# Altium PCB Tensile Test PCB Green.pcbdoc
Units mm, origin at the board's own origin, x right, y up, seen from the top; angles counter-clockwise.
Board outline 132.9 x 132.77 mm, 2 copper layers (Top Layer, Bottom Layer); 31 components, 47 nets, 166 pads, 13 vias.
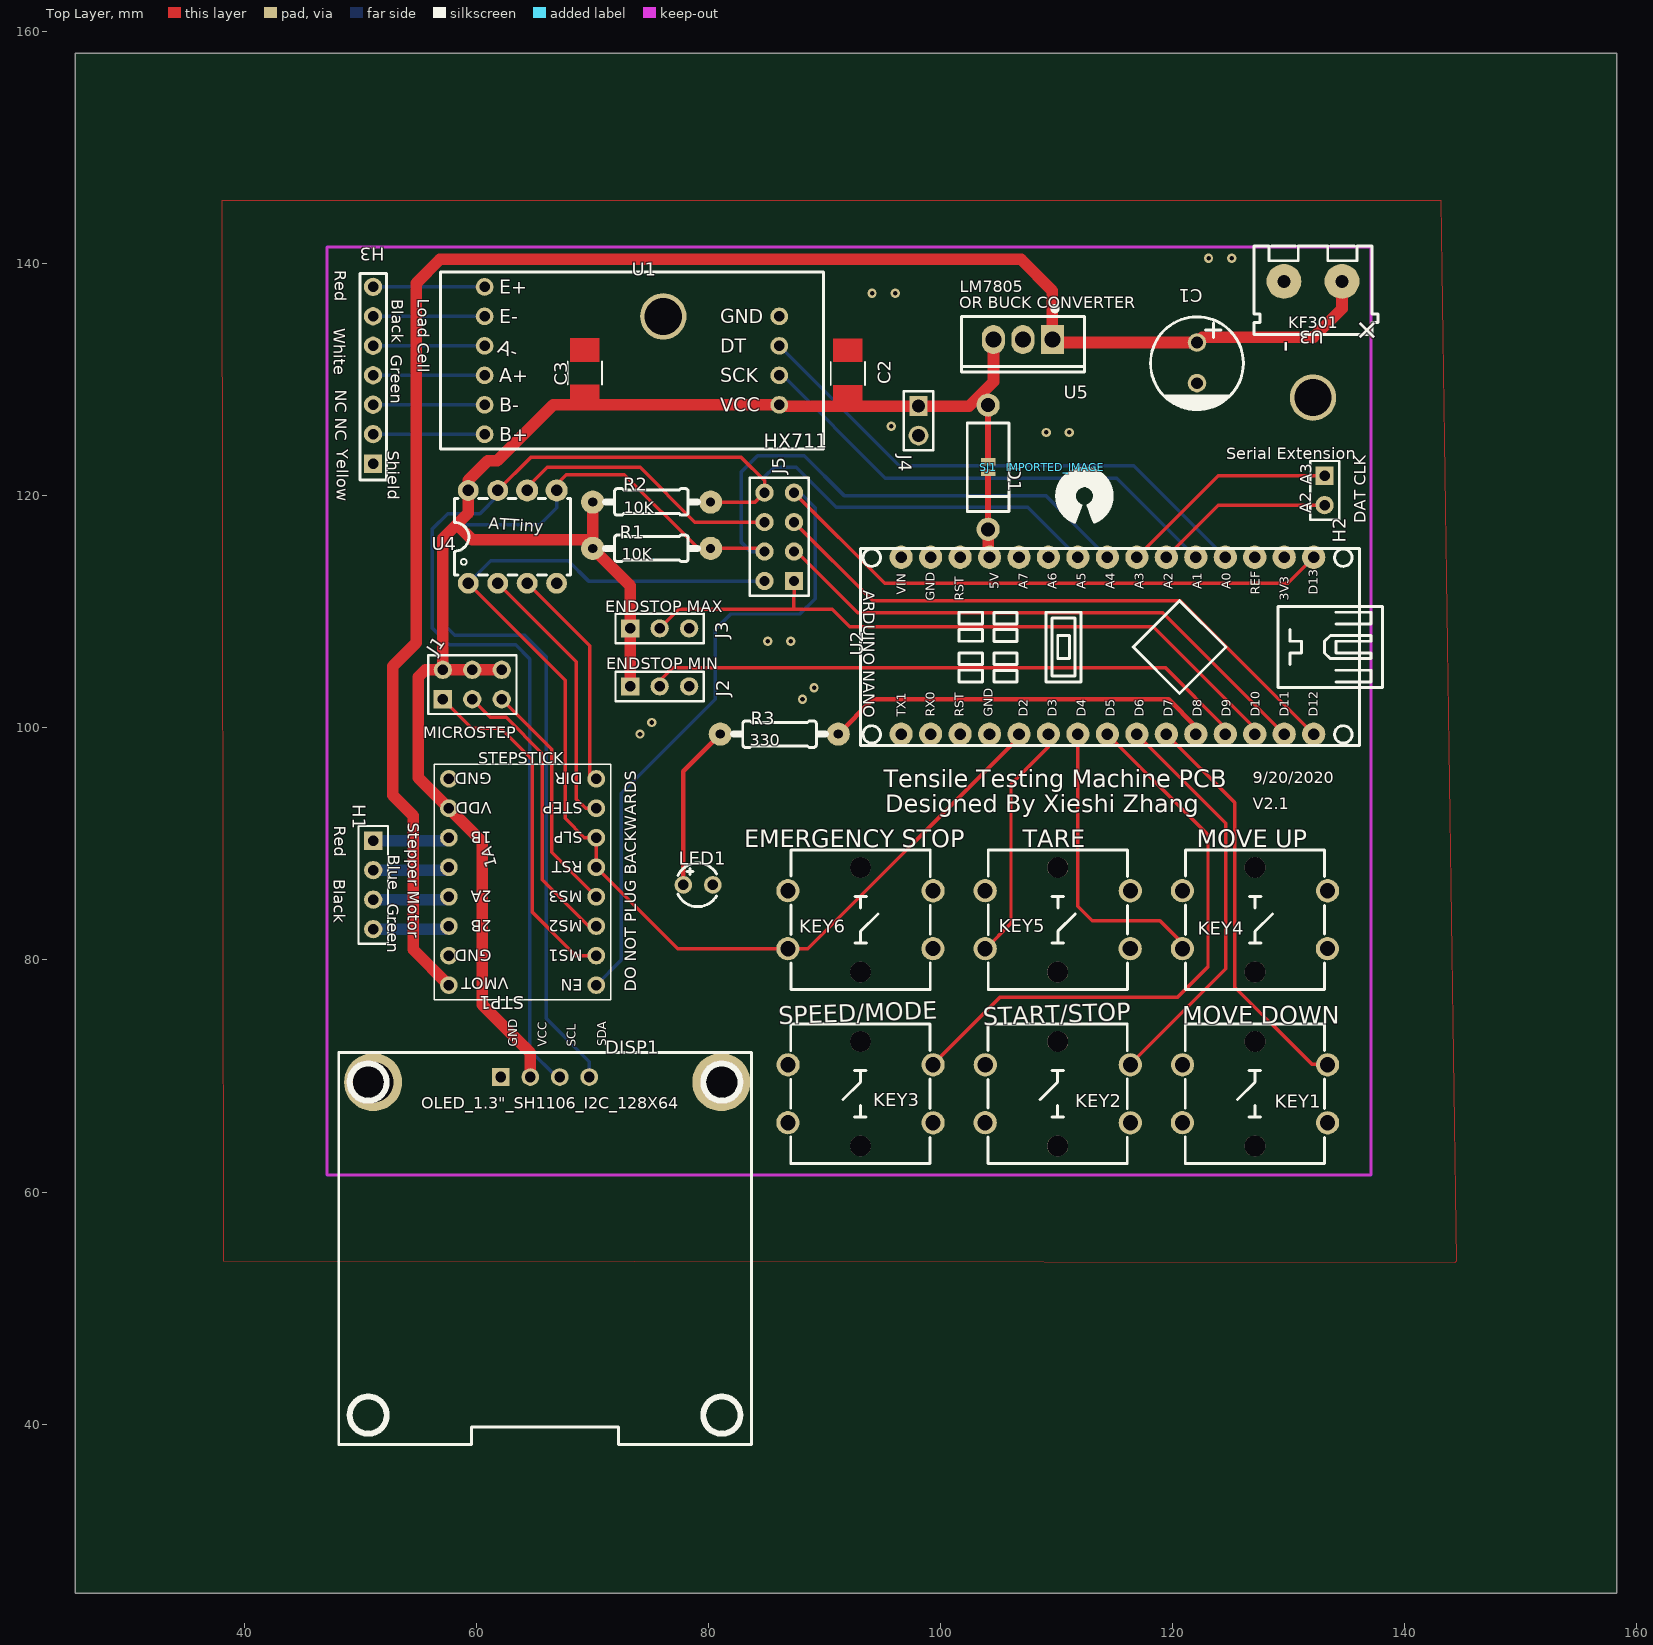
[diagram p0: Top Layer view]
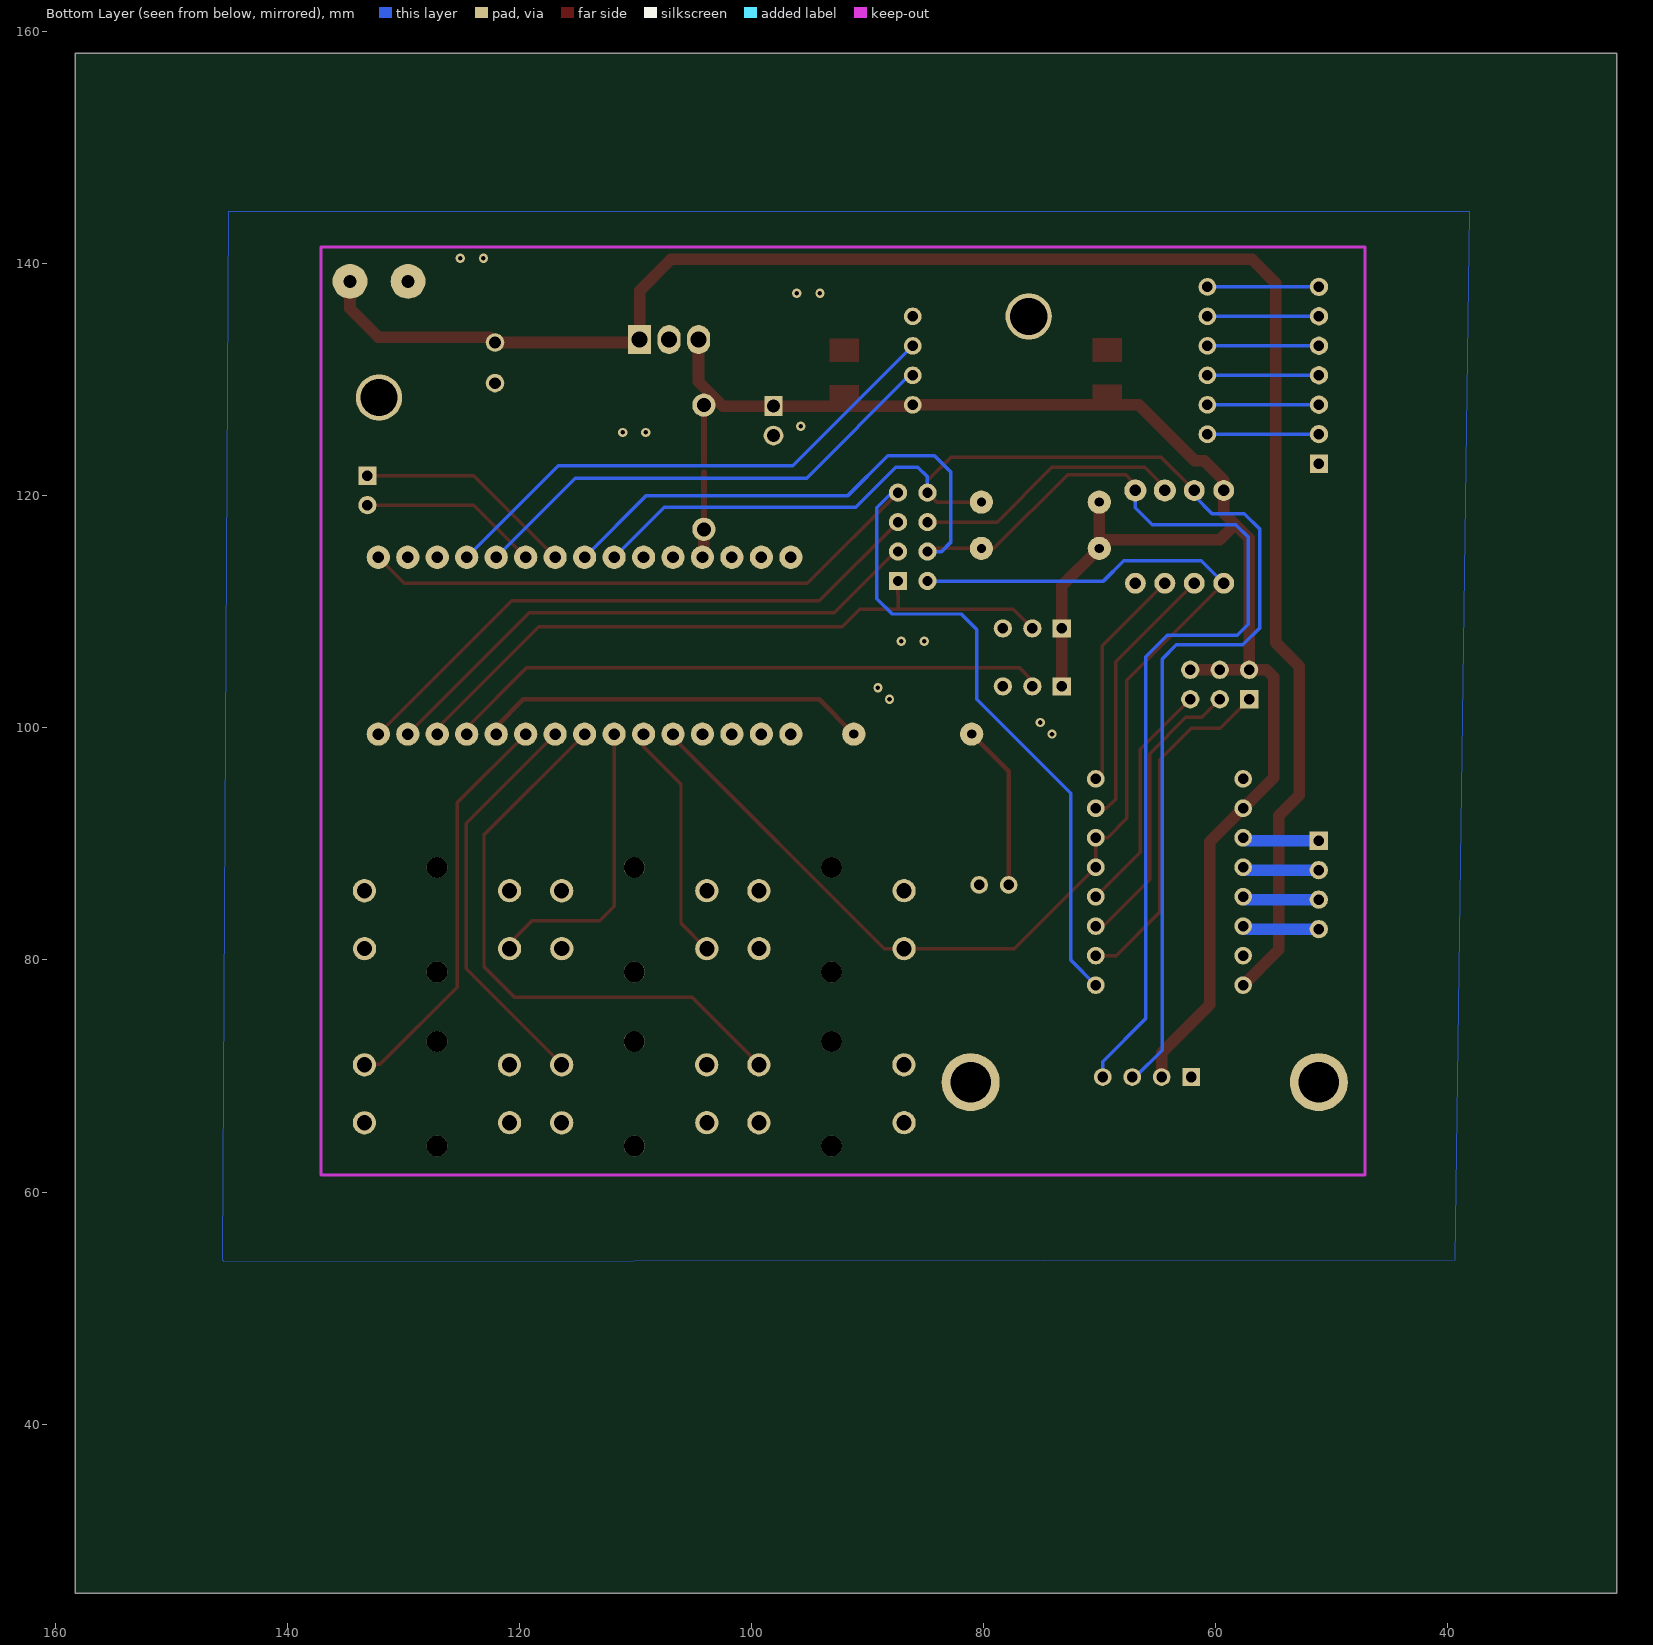
[diagram p1: Bottom Layer view, seen from below]

## Layer stack, top to bottom
Top Layer: signal copper (thickness not stored)
Dielectric: dielectric 0.32, FR-4, Dk 4.8
Bottom Layer: signal copper (thickness not stored)

## Board outline
158.3,25.4 25.4,25.4 25.4,158.169 158.3,158.169

## Components (designator, comment, footprint, x,y, rotation, side; value= is the part's Value field where it differs from the comment)
C1 "100uF" CAP-TH_BD8.0-P3.50-D1.0-FD 122.1,131.469 r270 top
C2 "10uF" C_1210_HANDSOLDERING 90.77,130.439 r90 top
C3 "10uF" C_1210_HANDSOLDERING 68.1,130.469 r90 top
D1 "SR240" DO-15_BD3.1-L6.7-P10.70-D0.9-FD 104.1,122.469 r270 top
DISP1 "SSH1106_1.3IN_128X64_I2C_OLED_NEW_TAYEB COPY" "SSH1106 1.3IN 128X64 I2C (HOLES)" 62.1,69.469 r0 top
H1 "HDR-F-2.54_1x4" HDR-F-2.54_1X4 51.1,86.469 r270 top
H2 "HDR-F-2.54_1x2" HDR-F-2.54_1X2 133.1,120.469 r270 top
H3 "sch_HEADER-JV-FEMALE-2.54_1X7" HEADER-JV-FEMALE-2.54_1X7 51.089,122.778 r0 top
IMPORTED_IMAGE "IMPORTED_IMAGE" IMPORTED_IMAGE 109.903,122.477 r0 top
J1 "HDR-M-2.54_2x3" HDR-M-2.54_2X3 57.1,102.469 r0 top
J2 "HDR-M-2.54_1x3" HDR-M-2.54_1X3 75.79,103.579 r0 top
J3 "HDR-M-2.54_1x3" HDR-M-2.54_1X3 75.79,108.579 r0 top
J4 "HDR-M-2.54_1x2" HDR-M-2.54_1X2 98.1,126.469 r270 top
J5 "HDR-M-2.54_2x4" HDR-M-2.54_2X4 86.1,116.469 r90 top
KEY1 "B3F-4000" KEY-TH_4P-L12.0-W12.0-P5.00-LS13.4-EH 127.1,68.469 r180 top
KEY2 "B3F-4000" KEY-TH_4P-L12.0-W12.0-P5.00-LS13.4-EH 110.1,68.469 r180 top
KEY3 "B3F-4000" KEY-TH_4P-L12.0-W12.0-P5.00-LS13.4-EH 93.1,68.469 r180 top
KEY4 "B3F-4000" KEY-TH_4P-L12.0-W12.0-P5.00-LS13.4-EH 127.1,83.469 r0 top
KEY5 "B3F-4000" KEY-TH_4P-L12.0-W12.0-P5.00-LS13.4-EH 110.1,83.469 r0 top
KEY6 "B3F-4000" KEY-TH_4P-L12.0-W12.0-P5.00-LS13.4-EH 93.1,83.469 r0 top
LED1 "TJ-L3FYTLDRMFCSFLC2R-A5" LED-TH_BD3.8-P2.54-FD 79.1,86.469 r0 top
R1 "10K" "SDK 1/4W RESISTOR" 75.1,115.469 r180 top
R2 "10K" "SDK 1/4W RESISTOR" 75.1,119.469 r180 top
R3 "330" "SDK 1/4W RESISTOR" 86.1,99.469 r0 top
SJ1 "JUMPER-PAD-2-NO" PAD-JUMPER-2-NO_NO_SILK 104.1,122.469 r90 top
STP1 "STEPPERDRIVER" STEPERDRIVER 64.1,86.469 r180 top
U1 "HX711" XFW-HX711 86.1,135.469 r0 top
U2 "Arduino_Nano" PRV_ARDUINONANO 93.1,98.469 r90 top
U3 "KF301-2P-5.0MM EDITED" "KF301-2P-5.0MM EDITED" 132.1,137.469 r180 top
U4 "ATTINY85-20PU" PDIP-8_L9.5-W6.6-P2.54-LS8.0-BL 63.1,116.469 r0 top
U5 "LM7805CT" TO-220-3_L10.0-W4.5-P2.54-L 107.1,133.469 r180 top

## Footprints (in the part's own frame and the unit in brackets; to place one, negate y for a bottom-side part, rotate by r counter-clockwise, add the part's x,y. Pads: shape width x height; smd on the part's side, far side on the other; paste and mask are expansions set on the pad)
C_1210_HANDSOLDERING [mm]
  round 0 smd: 1(-1.888,-1.236) 2(2.112,-1.236)
  Top Layer region: -2.888,0.014 -0.888,0.014 -0.888,-2.486 -2.888,-2.486
  Top Layer region: 1.112,0.014 3.112,0.014 3.112,-2.486 1.112,-2.486
  silkscreen extent -0.89,-2.71 1.11,0.24
CAP-TH_BD8.0-P3.50-D1.0-FD [mm]
  round 1.6 hole 1: 1(-1.75,0) 2(1.75,0)
  silkscreen extent -3.96,-4 4.04,4
DO-15_BD3.1-L6.7-P10.70-D0.9-FD [mm]
  round 2 hole 1.2: 1(-5.35,0) 2(5.35,0)
  silkscreen extent -3.8,-1.8 3.8,1.8
HDR-F-2.54_1X2 [mil]
  rect 62x62 hole 35: 1(-50,0)
  round 62 hole 35: 2(50,0)
  silkscreen extent -100,-49 100,50
HDR-F-2.54_1X4 [mil]
  rect 62x62 hole 35: 1(-150,0)
  round 62 hole 35: 2(-50,0) 3(50,0) 4(150,0)
  silkscreen extent -200,-50 200,50
HDR-M-2.54_1X2 [mm]
  rect 1.7x1.575 hole 1.1: 1(-1.27,0)
  round 1.7 hole 1.1: 2(1.27,0)
  silkscreen extent -2.54,-1.27 2.54,1.27
HDR-M-2.54_1X3 [mil]
  rect 62x62 hole 35: 1(-100,0)
  round 62 hole 35: 2(0,0) 3(100,0)
  silkscreen extent -150,-50 150,50
HDR-M-2.54_2X3 [mil]
  rect 62x62 hole 35: 1(0,0)
  round 62 hole 35: 2(0,100) 3(100,0) 4(100,100) 5(200,0) 6(200,100)
  silkscreen extent -50,-50 250,150
HDR-M-2.54_2X4 [mil]
  rect 62x62 hole 35: 1(-150,-50)
  round 62 hole 35: 2(-150,50) 3(-50,-50) 4(-50,50) 5(50,-50) 6(50,50) 7(150,-50) 8(150,50)
  silkscreen extent -200,-100 200,100
HEADER-JV-FEMALE-2.54_1X7 [mm]
  rect 1.575x1.575 hole 0.914: 1(0,0)
  round 1.575 hole 0.914: 2(0,2.54) 3(0,5.08) 4(0,7.62) 5(0,10.16) 6(0,12.7) 7(0,15.24)
  silkscreen extent -1.14,-1.4 1.14,16.38
IMPORTED_IMAGE [mm]
  silkscreen extent 0,-4.84 4.99,0
KEY-TH_4P-L12.0-W12.0-P5.00-LS13.4-EH [mm]
  round 2 hole 1.3: 1(-6.253,-2.499) 2(6.246,-2.497) 3(6.253,2.497) 4(-6.253,2.499)
  round 1.8 hole 1.8 unplated: ""(0,4.5) ""(0,-4.5)
  silkscreen extent -5.99,-6 6.01,6
"KF301-2P-5.0MM EDITED" [mm]
  round 3 hole 1.1: 1(-2.5,-1.016) 2(2.5,-1.016)
  silkscreen extent -5.59,-4.06 5.08,3.56
LED-TH_BD3.8-P2.54-FD [mil]
  round 60 hole 35.43: 1(-50,0) 2(50,0)
  silkscreen extent -68,-74 63,74
PAD-JUMPER-2-NO_NO_SILK [mil]
  rect 25x50 smd: 1(-18,0) 2(18,0)
PDIP-8_L9.5-W6.6-P2.54-LS8.0-BL [mm]
  round 1.8 hole 1: 1(-3.81,-4) 2(-1.27,-4) 3(1.27,-4) 4(3.81,-4) 7(-1.27,4) 8(-3.81,4)
  round 1.905 hole 1: 5(3.81,4) 6(1.27,4)
  silkscreen extent -5,-3.3 5,3.3
PRV_ARDUINONANO [mm]
  round 2 hole 1: 1(1.001,-3.5) 2(1.001,-6.04) 3(1.001,-8.58) 4(1.001,-11.12) 5(1.001,-13.66) 6(1.001,-16.2) 7(1.001,-18.74) 8(1.001,-21.28) 9(1.001,-23.82) 10(1.001,-26.36) 11(1.001,-28.9) 12(1.001,-31.44) 13(1.001,-33.98) 14(1.001,-36.52) 15(1.001,-39.06) 16(16.241,-39.06) 17(16.241,-36.52) 18(16.241,-33.98) 19(16.241,-31.44) 20(16.241,-28.9) 21(16.241,-26.36) 22(16.241,-23.82) 23(16.241,-21.28) 24(16.241,-18.74) 25(16.241,-16.2) 26(16.241,-13.66) 27(16.241,-11.12) 28(16.241,-8.58) 29(16.241,-6.04) 30(16.241,-3.5)
  silkscreen extent 0,-45 17,0
"SDK 1/4W RESISTOR" [mm]
  round 2 hole 0.8: 1(-5.08,0) 2(5.08,0)
  silkscreen extent -3.93,-1.15 3.99,1.13
"SSH1106 1.3IN 128X64 I2C (HOLES)" [mil]
  rect 60x60 hole 36: 1(0,17.32)
  round 60 hole 36: 2(100,17.32) 3(200,17.32) 4(300,17.32)
  silkscreen extent -550,-1230 850,100
STEPERDRIVER [mil]
  round 60 hole 36: 1(-245,340) 2(-245,240) 3(-245,140) 4(-245,40) 5(-245,-60) 6(-245,-160) 7(-245,-260) 8(-245,-360) 9(255,-360) 10(255,-260) 11(255,-160) 12(255,-60) 13(255,40) 14(255,140) 15(255,240) 16(255,340)
  silkscreen extent -295,-410 305,390
TO-220-3_L10.0-W4.5-P2.54-L [mm]
  rect 2.002x2.499 hole 1.4: 1(-2.54,0)
  oval 2x2.5 hole 1.4 copper offset 0,0: 2(0,0) 3(2.54,0)
  silkscreen extent -5.3,-2.86 5.3,2.8
XFW-HX711 [mil]
  round 60 hole 36: 1(-1000,100) 2(-1000,0) 3(-1000,-100) 4(-1000,-200) 5(-1000,-300) 6(-1000,-400) 7(0,-300) 8(0,-200) 9(0,-100) 10(0,0)
  silkscreen extent -1150,-450 150,150

## Free pads (board coordinates)
  round 4 hole 3.2: 1(76.1,135.469) 1(132.1,128.469)
  round 5 hole 3.5: 2(51.1,69.469) 2(81.1,69.469)

## Via types
v1: diameter 0.8, hole 0.4, Top Layer to Bottom Layer, 13 vias

## Nets (pads, with @x,y where several pads share a name; then routed paths per layer and width w, separated by ;. In a path a pad name is that pad's centre, name@x,y a point inside that pad or via, vN(x,y) a via of type N, cw(c..) or ccw(c..) an arc to the next point about the centre after c; other vN are vias at no path point)
1: pad.1@132.1,128.469
2: pad.1@76.1,135.469
3: pad.2@51.1,69.469
4: pad.2@81.1,69.469
+5V: C2.1 C3.1 D1.1 DISP1.2 J1.2 J1.4 J1.6 J2.1 J3.1 J4.1 R1.2 R2.2 SJ1.2 STP1.10 U1.7 U4.8 U5.3 | length 151.1
  Top Layer w0.5: SJ1.2 D1.1
  Top Layer w1: J1.2 55.609,105.01 54.989,104.39 54.989,95.706 STP1.10 60.501,90.196 60.501,76.15 64.641,72.01 DISP1.2 ; 58.306,117.537 59.635,116.209 70.021,116.209 70.021,117.27 ; J1.6 J1.2 57.1,116.329 59.29,118.519 59.29,120.469 59.289,121.349 60.961,123.018 61.799,123.018 66.63,127.849 86.099,127.849 86.21,127.739 J4.1 102.45,127.739 104.56,129.849 U5.3 ; R2.2 R1.2 73.25,112.239 73.25,108.579 J2.1@73.25,103.579
+MOVE: KEY4.1 U2.7 | length 25.7
  Top Layer w0.3: U2.7@111.84,99.47 111.84,84.619 113.089,83.369 118.911,83.369 120.849,81.431 KEY4.1@120.849,80.928
-MOVE: KEY1.1 U2.10 | length 35
  Top Layer w0.3: U2.10@119.46,99.47 125.36,93.57 125.36,77.659 132.01,71.009 KEY1.1@133.351,71.009
D11: J5.3 U2.14 | length 48.8
  Top Layer w0.3: J5.3@87.369,115.198 87.59,115.198 92.861,109.93 119.16,109.93 U2.14@129.62,99.47
D12: J5.5 U2.15 | length 52.4
  Top Layer w0.3: J5.5 94.15,110.959 120.671,110.959 U2.15
DCAL_DT: H2.2 U2.21 | length 15.5
  Top Layer w0.3: U2.21 123.95,119.199 H2.2
DCAL_SCK: H2.1 U2.22 | length 19.1
  Top Layer w0.3: U2.22 123.95,121.739 H2.1
DIR: STP1.8 U4.3 | length 19.7
  Top Layer w0.3: U4.3@64.369,112.47 69.759,107.08 69.759,95.614 STP1.8
DT: U1.9 U2.19 | length 46
  Bottom Layer w0.3: U1.9@86.099,132.929 96.429,122.599 116.65,122.599 U2.19@124.54,114.71
EN: J5.7 STP1.1 U2.16 | length 103.8
  Top Layer w0.3: J5.7@87.369,120.278 95.19,112.459 129.909,112.459 U2.16@132.16,114.71
  Bottom Layer w0.3: STP1.1 72.49,80 72.49,94.379 80.58,102.469 80.58,108.479 81.92,109.819 87.87,109.819 89.2,111.149 89.2,118.979 87.9,120.279 J5.7
ENDSTOP1: J2.2 U2.12 | length 52.4
  Top Layer w0.3: J2.2 75.789,104.07 76.899,105.18 119.391,105.18 124.54,100.029 U2.12@124.54,99.47
ENDSTOP2: J3.2 J5.1 U2.13 | length 59.2
  Top Layer w0.3: J3.2@75.789,108.578 77.44,110.229 90.679,110.229 92.18,108.728 118.329,108.728 127.08,99.978 U2.13@127.08,99.47 ; 87.362,110.229 J5.1@87.369,112.66
ESTOP: J5.2 KEY6.1 STP1.5 STP1.6 U2.5 U4.1 | length 103.9
  Top Layer w0.3: U4.1@59.289,112.47 67.641,104.118 67.641,92.198 69.305,90.534 STP1.6 ; STP1.6 STP1.5 77.346,80.97 KEY6.1 ; KEY6.1@86.846,80.969 88.56,80.969 106.76,99.17 U2.5@106.76,99.47
  Bottom Layer w0.3: U4.1@59.29,112.469 61.22,114.399 67.92,114.399 69.66,112.659 J5.2
GND: C1.2 C2.2 C3.2 DISP1.1 H3.1 J2.3 J3.3 J4.2 KEY1.3 KEY1.4 KEY2.3 KEY2.4 KEY3.3 KEY3.4 KEY4.3 KEY4.4 KEY5.3 KEY5.4 KEY6.3 KEY6.4 LED1.2 STP1.9 STP1.15 U1.10 U2.4 U2.29 U3.2 U4.4 U5.2
  other v1: 74.1,99.469 75.1,100.469 88.1,102.469 89.1,103.469 85.1,107.469 87.1,107.469 109.1,125.469 111.1,125.469 95.76,126.009 94.1,137.469 96.1,137.469 123.1,140.469 125.1,140.469
LED: R3.2 U2.11 | length 33.7
  Top Layer w0.4: R3.2@91.179,99.47 94.169,102.46 119.66,102.46 122,100.118 U2.11@122,99.47
LED1_1: LED1.1 R3.1 | length 14.3
  Top Layer w0.4: LED1.1 77.83,96.279 R3.1
PB1: J5.6 U4.6 | length 23.4
  Top Layer w0.3: U4.6@64.37,120.469 64.37,120.749 66.09,122.469 74.1,122.469 78.83,117.739 J5.6
S$12: 
S$1234: 
S$1236: 
S$1238: 
SCK: U1.8 U2.20 | length 42.4
  Bottom Layer w0.3: U1.8@86.099,130.389 86.389,130.389 95.248,121.53 115.18,121.53 U2.20@122,114.71
SCL: DISP1.3 J5.8 R2.1 U2.24 U4.7 | length 125.5
  Top Layer w0.3: U4.7@61.83,120.469 64.67,123.309 82.81,123.309 84.83,121.289 J5.8 84.02,119.469 R2.1
  Bottom Layer w0.3: U4.7@61.829,120.468 61.829,119.998 60.3,118.469 57.519,118.469 56.17,117.118 56.17,108.649 57.659,107.159 63.379,107.159 64.601,105.939 64.601,72.228 66.92,69.909 DISP1.3 ; J5.8@84.829,120.278 84.829,121.639 85.66,122.47 87.57,122.47 91.012,119.028 107.522,119.028 U2.24@111.84,114.71
SDA: DISP1.4 J5.4 R1.1 U2.23 U4.5 | length 133.2
  Top Layer w0.3: U4.5@66.909,120.468 66.909,120.989 67.74,121.819 72.749,121.819 79.099,115.469 R1.1 ; R1.1 84.56,115.469 J5.4
  Bottom Layer w0.3: U4.5@66.909,120.468 66.909,118.98 65.449,117.519 58.251,117.519 57.189,116.46 57.189,108.929 58.131,107.989 64.151,107.989 66,106.14 66,74.959 69.721,71.238 DISP1.4 ; J5.4@84.829,115.198 83.62,115.198 82.84,115.98 82.84,122.068 84.222,123.45 88.258,123.45 91.68,120.029 109.061,120.029 U2.23@114.38,114.71
SPEED-SEL: KEY3.1 U2.8 | length 50.8
  Top Layer w0.3: KEY3.1@99.35,71.009 105.111,76.77 120.402,76.77 123.051,79.419 123.051,90.801 U2.8@114.38,99.47
START: KEY2.1 U2.9 | length 35.1
  Top Layer w0.3: KEY2.1@116.351,71.009 124.59,79.249 124.59,91.799 U2.9@116.92,99.47
STEP: STP1.7 U4.2 | length 23.5
  Top Layer w0.3: U4.2@61.829,112.47 68.611,105.69 68.611,93.869 69.406,93.074 STP1.7
STP1_2: J1.1 STP1.2 | length 30.1
  Top Layer w0.3: J1.1 59.582,99.988 62.081,99.988 64.799,97.27 64.799,84.138 68.566,80.374 STP1.2
STP1_3: J1.3 STP1.3 | length 25.2
  Top Layer w0.3: J1.3 61.2,100.91 62.551,100.91 65.68,97.781 65.68,86.899 69.665,82.914 STP1.3
STP1_4: J1.5 STP1.4 | length 20.6
  Top Layer w0.3: J1.5 62.18,102.139 62.52,102.139 66.49,98.169 66.49,89.287 STP1.4
STP1_11: H1.1 STP1.11 | length 6.6
  Bottom Layer w1: H1.1 57.369,90.279 STP1.11
STP1_12: H1.2 STP1.12 | length 6.6
  Bottom Layer w1: H1.2 57.369,87.739 STP1.12
STP1_13: H1.3 STP1.13 | length 6.6
  Bottom Layer w1: H1.3 57.369,85.199 STP1.13
STP1_14: H1.4 STP1.14 | length 6.6
  Bottom Layer w1: H1.4 57.369,82.659 STP1.14
TARE: KEY5.1 U2.6 | length 20.8
  Top Layer w0.3: KEY5.1@103.849,80.928 106.071,83.15 106.071,95.149 109.3,98.38 U2.6@109.3,99.47
U1_1: H3.7 U1.1 | length 9.6
  Bottom Layer w0.3: H3.7 51.099,138.009 U1.1
U1_2: H3.6 U1.2 | length 9.6
  Bottom Layer w0.3: H3.6 51.099,135.469 U1.2
U1_3: H3.5 U1.3 | length 9.6
  Bottom Layer w0.3: H3.5 51.099,132.929 U1.3
U1_4: H3.4 U1.4 | length 9.6
  Bottom Layer w0.3: H3.4 51.099,130.389 U1.4
U1_5: H3.3 U1.5 | length 9.6
  Bottom Layer w0.3: H3.3 51.099,127.849 U1.5
U1_6: H3.2 U1.6 | length 9.6
  Bottom Layer w0.3: H3.2 51.099,125.309 U1.6
U2_27: D1.2 SJ1.1 U2.27 | length 7.4
  Top Layer w0.5: D1.2 SJ1.1
  Top Layer w1: D1.2 104.1,114.83 U2.27
VCC: C1.1 STP1.16 U3.1 U5.1 | length 153
  Top Layer w1: STP1.16 54.55,80.906 54.55,92.439 52.78,94.209 52.78,105.329 54.8,107.349 54.8,138.329 56.85,140.379 106.94,140.379 109.64,137.679 U5.1 109.89,133.219 C1.1 122.57,133.689 132.16,133.689 134.6,136.129 U3.1
pads on no net: KEY1. KEY1.2 KEY2. KEY2.2 KEY3. KEY3.2 KEY4. KEY4.2 KEY5. KEY5.2 KEY6. KEY6.2 U2.1 U2.2 U2.3 U2.17 U2.18 U2.25 U2.26 U2.28 U2.30

## Polygon pours and split planes (outlines as drawn)
GND on Bottom Layer (solid): 38.1,144.469 145.1,144.469 145.6,54.169 145.47,54.039 39.36,54.169
GND on Top Layer (solid): 38.1,145.469 143.1,145.469 144.46,54.019 144.33,53.889 38.22,54.019

## Silkscreen, mask and mechanical layers (free items; w line width, h text height)
Top Overlay:
  text "Red" at 47.79,139.449 h1 r270
  text "LM7805" at 101.65,137.569 h1
  text "Load Cell" at 54.93,136.989 h1 r270
  text "Black" at 52.71,136.929 h1 r270
  text "OR BUCK CONVERTER" at 101.61,136.159 h1
  text "White" at 47.7,134.459 h1 r270
  text "KF301" at 129.95,134.459 h1
  text "Green" at 52.61,132.149 h1 r270
  text "NC NC" at 47.85,129.149 h1 r270
  text "Yellow" at 47.94,124.019 h1 r270
  text "Shield" at 52.34,123.879 h1 r270
  text "Serial Extension" at 124.62,123.159 h1
  text "A3" at 131.98,120.979 h1 r90
  text "CLK" at 136.64,120.889 h1 r90
  text "10K" at 72.69,118.489 h1
  text "A2" at 131.97,118.489 h1 r90
  text "DAT" at 136.65,117.639 h1 r90
  text "ATTiny" at 61.025,117.17 h1 r356
  text "10K" at 72.52,114.479 h1
  text "ARDUINO NANO" at 93.33,111.849 h1 r270
  text "ENDSTOP MAX" at 71.1,109.969 h1
  text "ENDSTOP MIN" at 71.2,105.069 h1
  text "MICROSTEP" at 55.41,99.119 h1
  text "330" at 83.54,98.469 h1
  text "STEPSTICK" at 60.15,96.909 h1
  text "9/20/2020" at 126.9,95.219 h1
  text "Tensile Testing Machine PCB" at 95.1,94.899 h1.5
  text "V2.1" at 126.92,92.989 h1
  text "Designed By Xieshi Zhang" at 95.25,92.739 h1.5
  text "Stepper Motor" at 54.08,91.819 h1 r270
  text "Red" at 47.76,91.549 h1 r270
  text "EMERGENCY STOP" at 83.1,89.719 h1.5
  text "TARE" at 107.1,89.719 h1.5
  text "MOVE UP" at 122.1,89.719 h1.5
  text "Blue" at 52.39,89.089 h1 r270
  text "Black" at 47.71,86.949 h1 r270
  text "Green" at 52.31,84.829 h1 r270
  text "DO NOT PLUG BACKWARDS" at 73.78,77.269 h1 r90
  text "MOVE DOWN" at 120.82,74.489 h1.5
  text "SPEED/MODE" at 86.056,74.449 h1.5 r2
  text "START/STOP" at 103.696,74.389 h1.5 r2
Document:
  lines w0.003: 91.824,91.759 91.875,91.81

## Text inside footprints (layer, text, board x,y; h text height)
DISP1: Top Overlay "VCC" at 66.037,72.517 h0.76 r90; Top Overlay "GND" at 63.497,72.517 h0.76 r90; Top Overlay "SCL" at 68.577,72.517 h0.76 r90; Top Overlay "SDA" at 71.203,72.568 h0.76 r90; Top Overlay "OLED_1.3\"_SH1106_I2C_128X64" at 55.242,67.191 h1
STP1: Top Overlay "MS1" at 69.18,80.881 h1.02 r180; Top Overlay "MS2" at 69.18,83.421 h1.02 r180; Top Overlay "MS3" at 69.18,85.961 h1.02 r180; Top Overlay "STEP" at 69.18,93.581 h1.02 r180; Top Overlay "DIR" at 69.18,96.121 h1.02 r180; Top Overlay "GND" at 61.306,96.121 h1.02 r180; Top Overlay "VDD" at 61.306,93.581 h1.02 r180; Top Overlay "1B" at 61.306,91.041 h1.02 r180; Top Overlay "1A" at 61.794,88.133 h1.02 r106; Top Overlay "2A" at 61.306,85.961 h1.02 r180; Top Overlay "2B" at 61.306,83.421 h1.02 r180; Top Overlay "GND" at 61.306,80.881 h1.02 r180; Top Overlay "VMOT" at 62.8,78.447 h1.02 r180; Top Overlay "EN" at 69.18,78.341 h1.02 r180; Top Overlay "RST" at 69.18,88.501 h1.02 r180; Top Overlay "SLP" at 69.18,91.041 h1.02 r180
U1: Top Overlay "GND" at 81.02,134.869 h1.2; Top Overlay "DT" at 81.02,132.329 h1.2; Top Overlay "SCK" at 81.02,129.789 h1.2; Top Overlay "VCC" at 81.02,127.249 h1.2; Top Overlay "E+" at 61.97,137.409 h1.2; Top Overlay "E-" at 61.97,134.869 h1.2; Top Overlay "A-" at 61.765,132.365 h1.2 r340; Top Overlay "A+" at 61.97,129.789 h1.2; Top Overlay "B-" at 61.97,127.249 h1.2; Top Overlay "B+" at 61.97,124.709 h1.2
U2: Top Overlay "TX1" at 97,100.968 h0.8 r90; Top Overlay "RX0" at 99.5,100.968 h0.8 r90; Top Overlay "RST" at 101.999,100.968 h0.8 r90; Top Overlay "GND" at 104.501,100.968 h0.8 r90; Top Overlay "D2" at 107.501,100.968 h0.8 r90; Top Overlay "D3" at 110,100.968 h0.8 r90; Top Overlay "D4" at 112.502,100.968 h0.8 r90; Top Overlay "D5" at 115.001,100.968 h0.8 r90; Top Overlay "D6" at 117.501,100.968 h0.8 r90; Top Overlay "D7" at 120,100.968 h0.8 r90; Top Overlay "D8" at 122.499,100.968 h0.8 r90; Top Overlay "D9" at 124.996,100.966 h0.8 r90; Top Overlay "D10" at 127.498,100.968 h0.8 r90; Top Overlay "D11" at 130,100.968 h0.8 r90; Top Overlay "D12" at 132.499,100.968 h0.8 r90; Top Overlay "D13" at 132.499,111.469 h0.8 r90; Top Overlay "3V3" at 130,110.968 h0.8 r90; Top Overlay "REF" at 127.501,111.469 h0.8 r90; Top Overlay "A0" at 125.001,111.969 h0.8 r90; Top Overlay "A1" at 122.499,111.969 h0.8 r90; Top Overlay "A2" at 120,111.969 h0.8 r90; Top Overlay "A3" at 117.501,111.969 h0.8 r90; Top Overlay "A4" at 115.001,111.969 h0.8 r90; Top Overlay "A5" at 112.499,111.969 h0.8 r90; Top Overlay "A6" at 110,111.969 h0.8 r90; Top Overlay "A7" at 107.501,111.969 h0.8 r90; Top Overlay "5V" at 105.001,111.969 h0.8 r90; Top Overlay "RST" at 102.002,110.968 h0.8 r90; Top Overlay "GND" at 99.5,110.968 h0.8 r90; Top Overlay "VIN" at 97,111.469 h0.8 r90
U3: Top Overlay "-" at 129.024,133.359 h2.03 r270; Top Overlay "+" at 136.578,132.79 h2.03 r45